# Altium PCB LM-003.PcbDoc (part 1 of 2)
Units mm, origin at the board's own origin, x right, y up, seen from the top; angles counter-clockwise.
Board outline 67.01 x 194 mm, 6 copper layers (Top Layer, +5V, Mid-Layer 1, +3.3V, Mid-Layer 2, Bottom Layer), stack 1.23 mm thick; 63 components, 97 nets, 377 pads, 45 vias.
Unrouted connection lines stored in the file: 19.
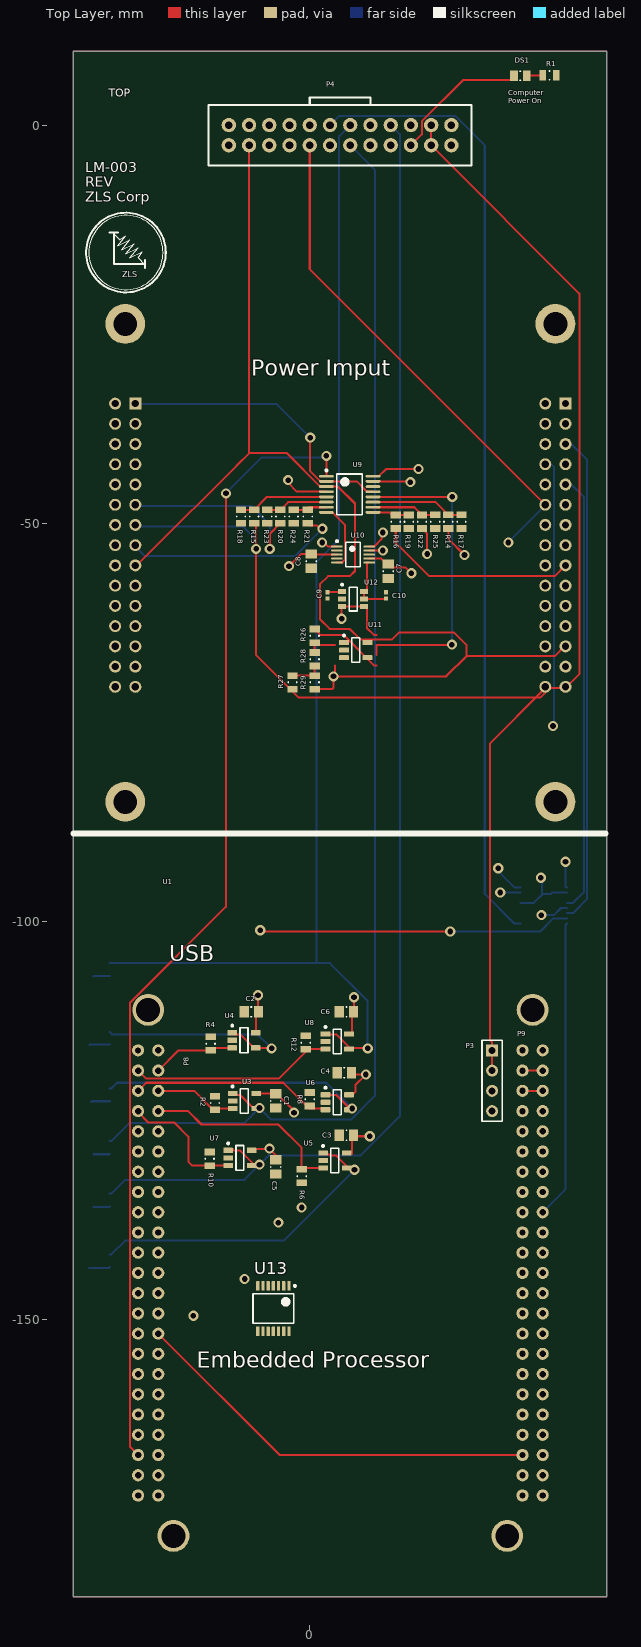
[diagram p0: Top Layer view]
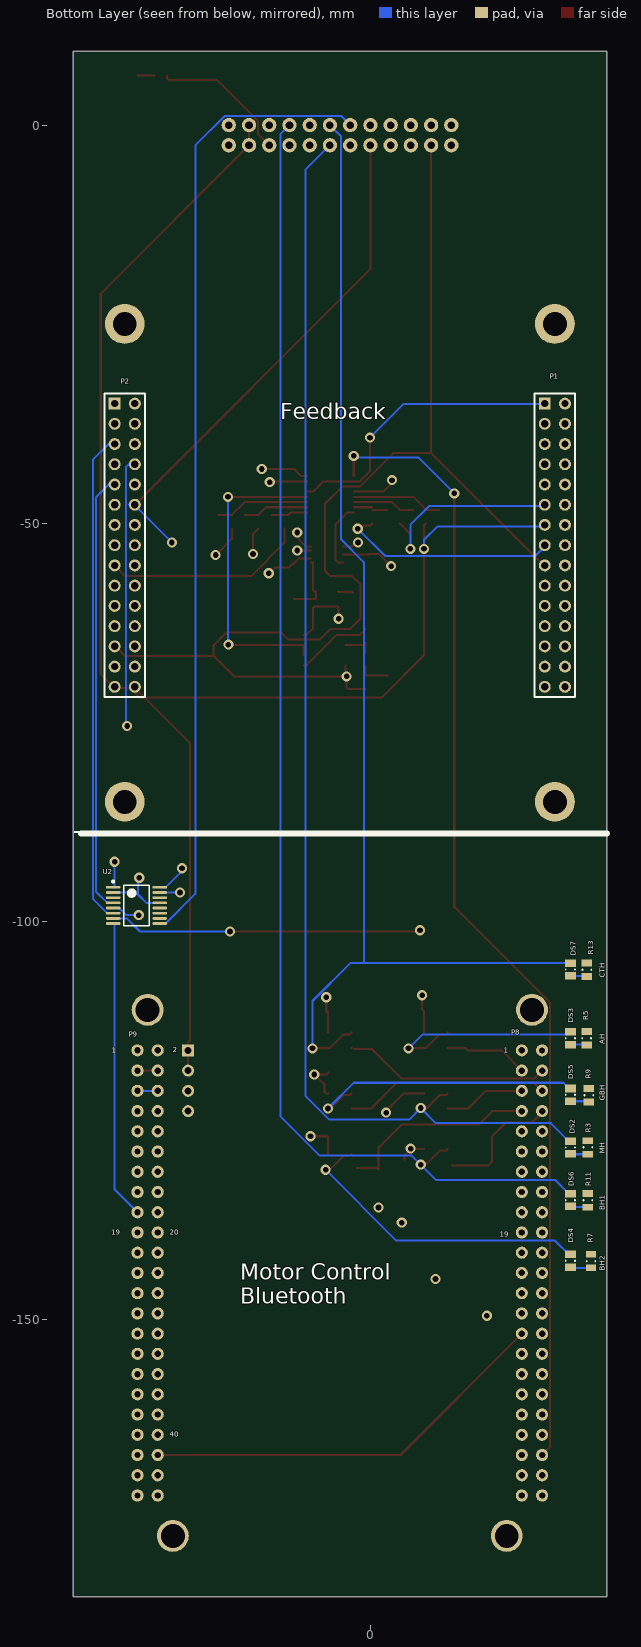
[diagram p1: Bottom Layer view, seen from below]
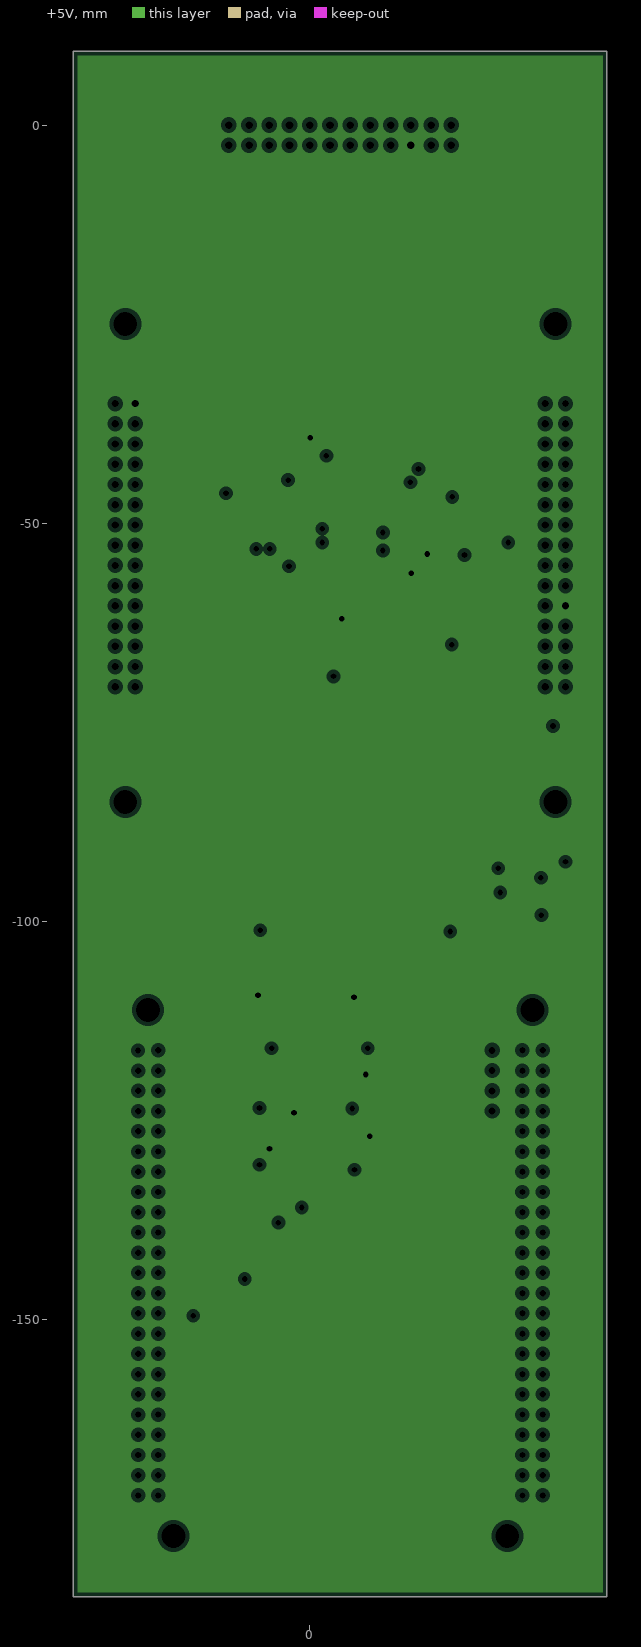
[diagram p2: +5V, clearances drawn from the general rule]
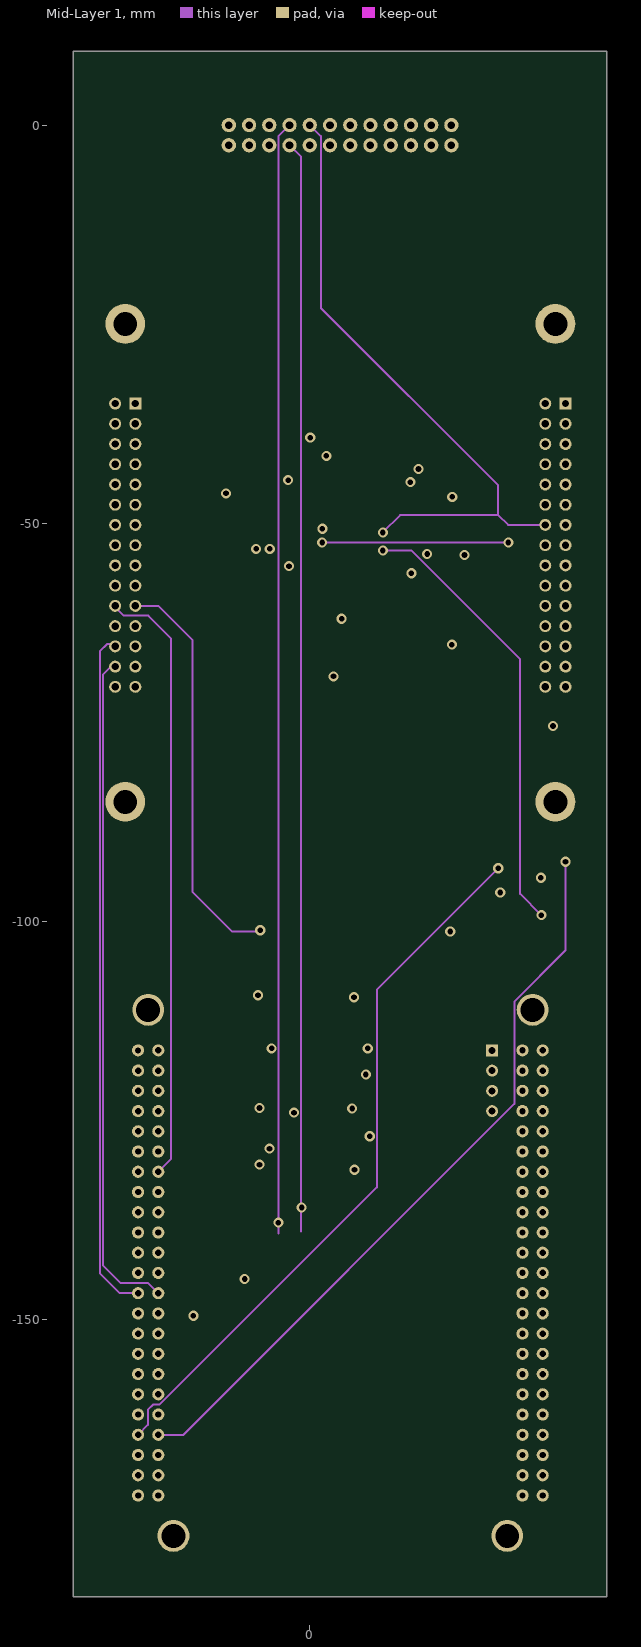
[diagram p3: Mid-Layer 1]
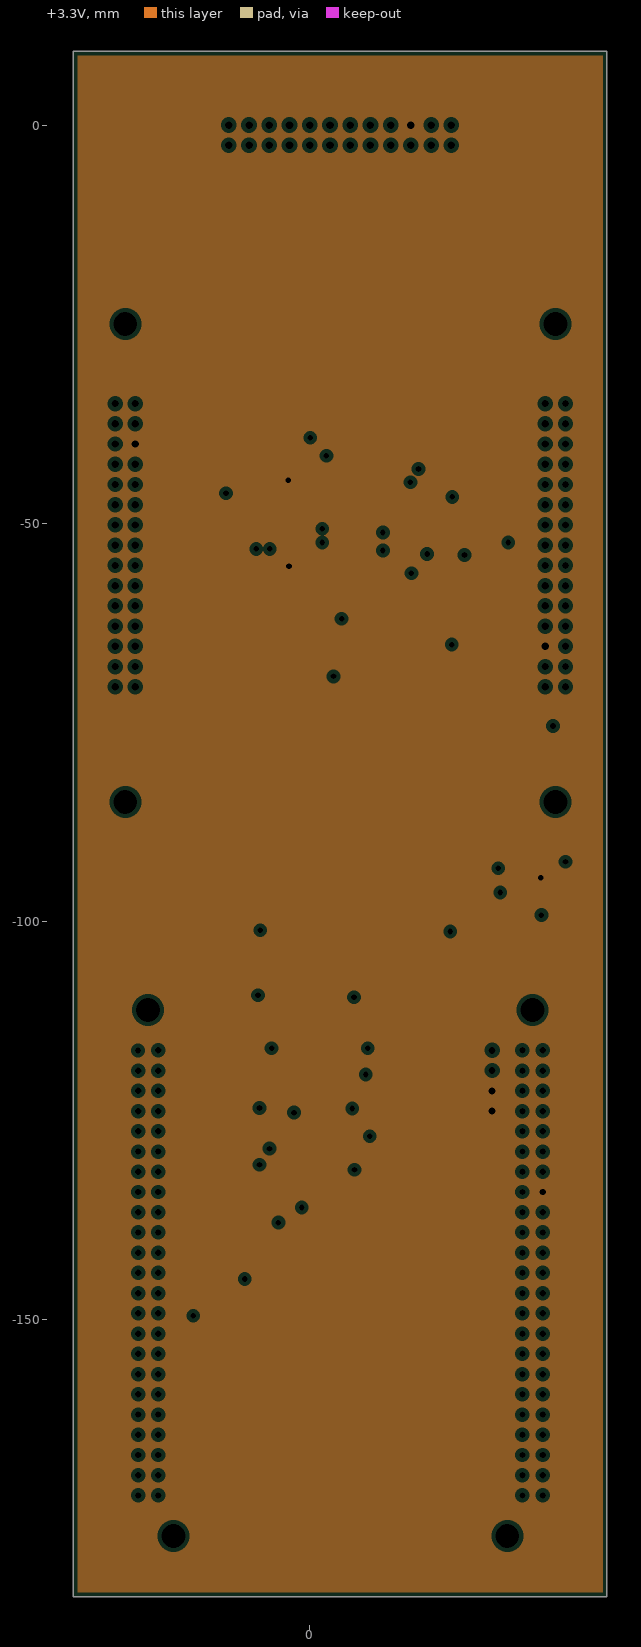
[diagram p4: +3.3V, clearances drawn from the general rule]
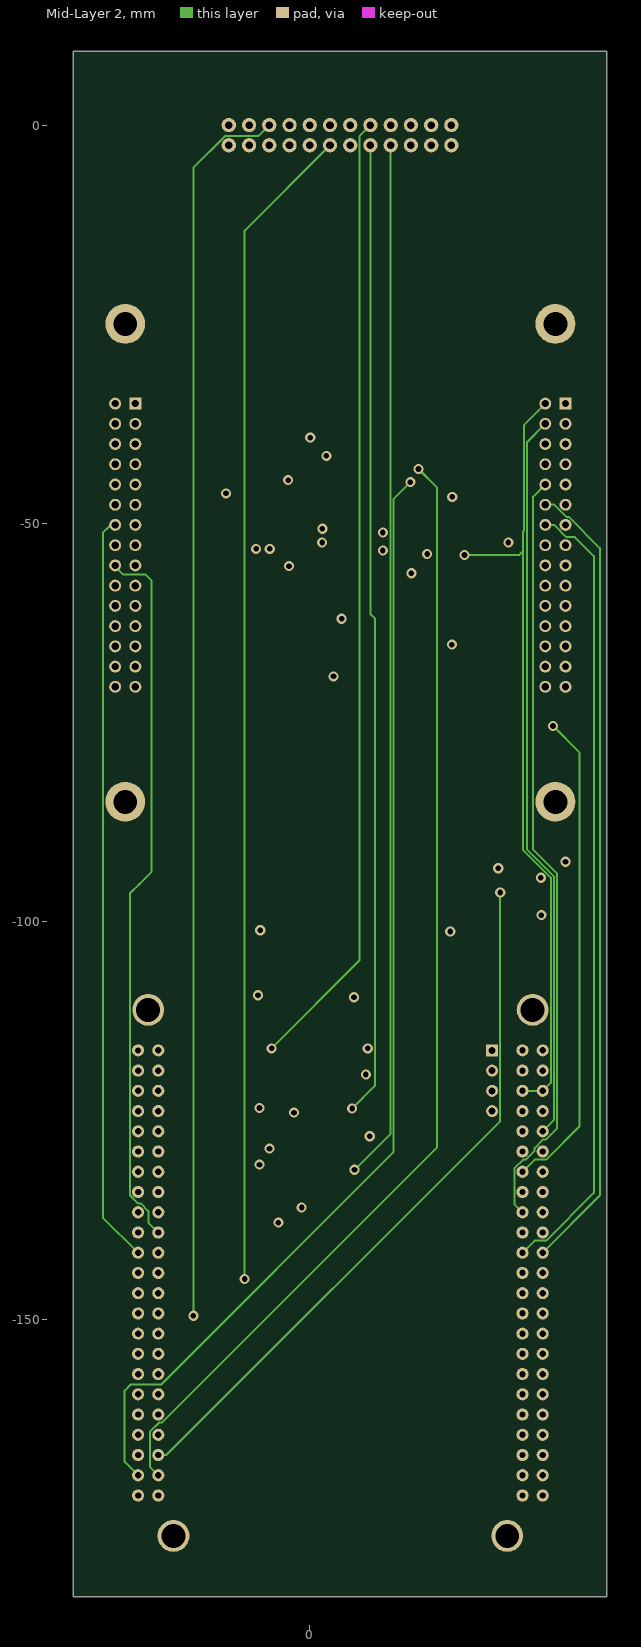
[diagram p5: Mid-Layer 2]

## Layer stack, top to bottom
Top Solder: solder mask 0.0102, Solder Resist, Dk 3.5
Top Layer: signal copper 0.0356
Dielectric 1: core 0.254, FR-4, Dk 4.2
+5V: plane copper 0.036, net +5
Dielectric 7: prepreg 0.127, Dk 4.2
Mid-Layer 1: signal copper 0.0356
Dielectric 6: core 0.254, Dk 4.2
+3.3V: plane copper 0.036, net +3.3
Dielectric2: prepreg 0.127, FR-4, Dk 4.2
Mid-Layer 2: signal copper 0.0356
Dielectric 5: core 0.254, Dk 4.2
Bottom Layer: signal copper 0.0356
Bottom Solder: solder mask 0.0102, Solder Resist, Dk 3.5

## Board outline
-29.695,-184.767 37.31,-184.767 37.31,9.234 -29.695,9.234

## Design rules (kind name [scope] priority, off if disabled: settings)
Clearance [All] p1: gap=0.127 ignorepadtopadclearanceinfootprint=FALSE except(0: Arc-Hole Track-Hole SMDPad-Hole THPad-Hole Via-Hole Fill-Hole Poly-Hole Region-Hole Text-Hole)
ComponentClearance [All] p1: gap=0.229 collisioncheckmode=3 verticalgap=0.254 showdistances=FALSE
HoleSize [All] p1: absolutevalues=TRUE maxlimit=5 minlimit=0.127 maxpercent=80.000 minpercent=20.000
MinimumAnnularRing [All] p1: minimumring=0.254
MinimumSolderMaskSliver [All] p1: minsoldermaskwidth=0.051
PlaneClearance [All] p1: clearance=0.508
PlaneConnect [All] p1: planeconnectstyle=Relief reliefexpansion=0.508 reliefentries=4 reliefconductorwidth=0.254 reliefairgap=0.254
PolygonConnect [All] p1: connectstyle=Relief reliefconductorwidth=0.254 reliefentries=4 polygonreliefangle="90 Angle" airgapwidth=0.254
RoutingVias [All] p1: holewidth=0.3 width=0.7 viastyle="Through Hole" minholewidth=0.1 minwidth=0.381 maxholewidth=0.711 maxwidth=1.27
SilkToSilkClearance [All] p1: silktosilkclearance=0.1
SilkToSolderMaskClearance [IsPad] p1: minsilkscreentomaskgap=0.064 clearancetoexposedcopper=TRUE
SolderMaskExpansion [All] p1: expansion=0.051
Width [All] p1: maxlimit=1 minlimit=0.127 preferedwidth=0.254
23 further rules are at their usual default settings.

## Classes and differential pairs
component class heater_control: C1 C2 C3 C4 C5 C6 DS2 DS3 DS4 DS5 DS6 DS7 P4 R2 R3 R4 R5 R6 R7 R8 R9 R10 R11 R12 R13 U3 U4 U5 U6 U7 U8
component class ADC: C7 C8 C9 C10 R14 R15 R16 R17 R18 R19 R20 R21 R22 R23 R24 R25 R26 R27 R28 R29 U9 U10 U11 U12
component class Connectors: DS1 P1 P2 P3 P14 P16 P? R1
component class "BBB Headers": U1 U2 U13

## Components (designator, comment, footprint, x,y, rotation, side; value= is the part's Value field where it differs from the comment)
C1 "CAP CER 0.1UF 25V X7R 0805" CAPC0805(2012)145_N -4.283,-122.52 r90 top
C2 "CAP CER 0.1UF 25V X7R 0805" CAPC0805(2012)145_N -7.331,-111.344 r0 top
C3 "CAP CER 0.1UF 25V X7R 0805" CAPC0805(2012)145_N 4.607,-126.838 r0 top
C4 "CAP CER 0.1UF 25V X7R 0805" CAPC0805(2012)145_N 4.353,-118.964 r0 top
C5 "CAP CER 0.1UF 25V X7R 0805" CAPC0805(2012)145_N -4.283,-130.81 r90 top
C6 "CAP CER 0.1UF 25V X7R 0805" CAPC0805(2012)145_N 4.607,-111.344 r0 top
C7 "CAP CER 0.1UF 25V X7R 0805" CAPC0805(2012)145_N 9.838,-56.01 r270 top
C8 "CAP CER 0.1UF 25V X7R 0805" CAPC0805(2012)145_N 0.186,-54.74 r270 top
C9 "0.1uF" CAPC0402(1005)60_L 2.218,-59.058 r270 top
C10 "0.1uF" CAPC0402(1005)60_L 9.584,-59.058 r270 top
DS1 "Lite-On LTST-S220KGKT Green LED, 571 nm 2012 (0805) Side View, Rectangle Lens SMD package" 0805C_L 26.444,6.182 r0 top
DS2 "Visible Name Value Type    False Description Lite-On LTST-S220KRKT Red LED, 631 nm 2012 (0805) Side View, Rectangle Lens SMD package STRING" 0805C_L -25.111,-128.362 r270 bottom
DS3 "Visible Name Value Type    False Description Lite-On LTST-S220KRKT Red LED, 631 nm 2012 (0805) Side View, Rectangle Lens SMD package STRING" 0805C_L -25.111,-114.646 r270 bottom
DS4 "Visible Name Value Type    False Description Lite-On LTST-S220KRKT Red LED, 631 nm 2012 (0805) Side View, Rectangle Lens SMD package STRING" 0805C_L -25.111,-142.586 r270 bottom
DS5 "Visible Name Value Type    False Description Lite-On LTST-S220KRKT Red LED, 631 nm 2012 (0805) Side View, Rectangle Lens SMD package STRING" 0805C_L -25.111,-121.758 r270 bottom
DS6 "Visible Name Value Type    False Description Lite-On LTST-S220KRKT Red LED, 631 nm 2012 (0805) Side View, Rectangle Lens SMD package STRING" 0805C_L -25.111,-134.966 r270 bottom
DS7 "Visible Name Value Type    False Description Lite-On LTST-S220KRKT Red LED, 631 nm 2012 (0805) Side View, Rectangle Lens SMD package STRING" 0805C_L -25.111,-106.01 r270 bottom
P1 "SSW-115-23-G-D" SSW-115-23-G-D -21.89,-34.966 r270 bottom locked
P2 "SSW-115-23-G-D" SSW-115-23-G-D 32.11,-34.966 r270 bottom locked
P3 "TSW-104-14-G-S" HDR1X4 22.895,-116.17 r270 top locked
P4 "IPL1-112-01-F-S-K" IPL1-112-01-F-S-K 3.81,-1.27 r0 top
R1 "5.1K" RESC0805(2012)_L 30.099,6.23 r0 top
R2 "20k" RESC0805(2012)_L -11.903,-122.774 r90 top
R3 "4.99K" RESC0805(2012)_L -27.305,-128.356 r90 bottom
R4 "20K" RESC0805(2012)_L -12.446,-115.316 r90 top
R5 "4.99k" RESC0805(2012)_L -27.143,-114.646 r90 bottom
R6 "20K" RESC0805(2012)_L -1.016,-131.953 r270 top
R7 "4.99K" RESC0805(2012)_L -27.686,-142.621 r90 bottom
R8 "20K" RESC0805(2012)_L 0,-122.301 r90 top
R9 "4.99K" RESC0805(2012)_L -27.432,-121.793 r90 bottom
R10 "20K" RESC0805(2012)_L -12.573,-129.794 r90 top
R11 "4.99K" RESC0805(2012)_L -27.305,-135.001 r90 bottom
R12 "20K" RESC0805(2012)_L -0.508,-115.189 r90 top
R13 "4.99K" RESC0805(2012)_L -27.178,-106.045 r90 bottom
R14 "10k" RESC0805(2012)_L 17.399,-49.784 r90 top
R15 "47.5K" RESC0805(2012)_L -6.986,-49.149 r90 top
R16 "100K" RESC0805(2012)_L 10.795,-49.806 r90 top
R17 "10k" RESC0805(2012)_L 19.05,-49.784 r270 top
R18 "10k" RESC0805(2012)_L -8.636,-49.149 r270 top
R19 "10k" RESC0805(2012)_L 12.446,-49.806 r270 top
R20 "47.5K" RESC0805(2012)_L -3.683,-49.149 r90 top
R21 "47.5K" RESC0805(2012)_L -0.254,-49.149 r90 top
R22 "10k" RESC0805(2012)_L 14.097,-49.806 r90 top
R23 "10k" RESC0805(2012)_L -5.334,-49.149 r270 top
R24 "10k" RESC0805(2012)_L -2.032,-49.149 r270 top
R25 "10k" RESC0805(2012)_L 15.748,-49.784 r270 top
R26 "100K" RESC0805(2012)_L 0.608,-64.135 r90 top
R27 "100k" RESC0805(2012)_L -2.159,-69.977 r90 top
R28 "100k" RESC0805(2012)_L 0.608,-67.056 r90 top
R29 "15k" RESC0805(2012)_L 0.608,-69.977 r270 top
U1 "BBB Header x 2" "BEAGLEBONE BLACK THRU" 3.845,-144.11 r0 top locked
U2 "ADG1608BRUZ" ADI-RU-16_M 29.371,-97.971 r180 bottom
U3 "OPA188AIDBVR" DBV0005A_M -8.22,-122.52 r0 top
U4 "OPA188AIDBVR" DBV0005A_M -8.255,-114.9 r0 top
U5 "OPA188AIDBVR" DBV0005A_M 3.149,-129.99 r0 top
U6 "OPA188AIDBVR" DBV0005A_M 3.453,-122.682 r0 top
U7 "OPA188AIDBVR" DBV0005A_M -8.763,-129.667 r0 top
U8 "OPA188AIDBVR" DBV0005A_M 3.453,-115.062 r0 top
U9 "ADG1608BRUZ" ADI-RU-16_M 5.012,-46.358 r0 top
U10 "MAX11100EUB+T" U10+2_L 5.441,-53.923 r0 top
U11 "OPA188AIDBVR" DBV0005A_M 5.774,-65.916 r0 top
U12 "MAX6070AAUT41+T" SOT95P280X445-6N 5.441,-59.511 r0 top
U13 "OPA4188AIPW" PW0014A_L -4.572,-148.59 r270 top

## Footprints (in the part's own frame and the unit in brackets; to place one, negate y for a bottom-side part, rotate by r counter-clockwise, add the part's x,y. Pads: shape width x height; smd on the part's side, far side on the other; paste and mask are expansions set on the pad)
0805C_L [mm]
  rect 0.95x1.35 smd: 1(-0.8,0) 2(0.8,0)
  silkscreen extent -0.05,-0.58 0.05,0.58, body extent -1.1,-0.72 1.1,0.72, height 0.75
ADI-RU-16_M [mm] "SOP, 16-Leads, Body 5x4.4mm, Pitch 0.65mm, IPC Low Density"
  oval 1.85x0.35 smd: 1(-2.925,2.275) 2(-2.925,1.625) 3(-2.925,0.975) 4(-2.925,0.325) 5(-2.925,-0.325) 6(-2.925,-0.975) 7(-2.925,-1.625) 8(-2.925,-2.275) 9(2.925,-2.275) 10(2.925,-1.625) 11(2.925,-0.975) 12(2.925,-0.325) 13(2.925,0.325) 14(2.925,0.975) 15(2.925,1.625) 16(2.925,2.275)
  silkscreen extent -3.05,-2.55 1.6,3.12, body extent -2.25,-2.55 2.25,2.55, height 1.2
"BEAGLEBONE BLACK THRU" [mil]
  round 60 hole 31.5: 8-1(-900,1100) 8-3(-900,1000) 8-4(-1000,1000) 8-5(-900,900) 8-6(-1000,900) 8-7(-900,800) 8-8(-1000,800) 8-9(-900,700) 8-10(-1000,700) 8-11(-900,600) 8-12(-1000,600) 8-13(-900,500) 8-14(-1000,500) 8-15(-900,400) 8-16(-1000,400) 8-17(-900,300) 8-18(-1000,300) 8-19(-900,200) 8-20(-1000,200) 8-21(-900,100) 8-22(-1000,100) 8-23(-900,0) 8-24(-1000,0) 8-25(-900,-100) 8-26(-1000,-100) 8-27(-900,-200) 8-28(-1000,-200) 8-29(-900,-300) 8-30(-1000,-300) 8-31(-900,-400) 8-32(-1000,-400) 8-33(-900,-500) 8-34(-1000,-500) 8-35(-900,-600) 8-36(-1000,-600) 8-37(-900,-700) 8-38(-1000,-700) 8-39(-900,-800) 8-40(-1000,-800) 8-41(-900,-900) 8-42(-1000,-900) 8-43(-900,-1000) 8-44(-1000,-1000) 8-45(-900,-1100) 8-46(-1000,-1100) 9-1(1000,1100) 9-2(900,1100) 9-3(1000,1000) 9-4(900,1000) 9-5(1000,900) 9-6(900,900) 9-7(1000,800) 9-8(900,800) 9-9(1000,700) 9-10(900,700) 9-11(1000,600) 9-12(900,600) 9-13(1000,500) 9-14(900,500) 9-15(1000,400) 9-16(900,400) 9-17(1000,300) 9-18(900,300) 9-19(1000,200) 9-20(900,200) 9-21(1000,100) 9-22(900,100) 9-23(1000,0) 9-24(900,0) 9-25(1000,-100) 9-26(900,-100) 9-27(1000,-200) 9-28(900,-200) 9-29(1000,-300) 9-30(900,-300) 9-31(1000,-400) 9-32(900,-400) 9-33(1000,-500) 9-34(900,-500) 9-35(1000,-600) 9-36(900,-600) 9-37(1000,-700) 9-38(900,-700) 9-39(1000,-800) 9-40(900,-800) 9-41(1000,-900) 9-42(900,-900) 9-43(1000,-1000) 9-44(900,-1000) 9-45(1000,-1100) 9-46(900,-1100)
  round 60 hole 30 paste+0: 8-2(-1000,1100)
  round 157.48 hole 118.11 paste+0: ""(-950,1300)
  round 157.48 hole 118.11: ""(-825,-1300) ""(825,-1300) ""(950,1300)
  body extent -1048,-1163 1048,1160, height 315
CAPC0402(1005)60_L [mm] "Chip Capacitor, Body 1.0x0.5mm, Height 0.6mm, IPC High Density"
  rect 0.52x0.52 smd: 1(-0.4,0) 2(0.4,0)
  body extent -0.55,-0.3 0.55,0.3, height 0.6
CAPC0805(2012)145_N [mm] "Chip Capacitor, Body 2.0x1.2mm, Height 1.45mm, IPC Medium Density"
  rect 1.15x1.45 smd: 1(-0.9,0) 2(0.9,0)
  silkscreen extent -0.05,-0.62 0.05,0.63, body extent -1.1,-0.72 1.1,0.73, height 1.45
DBV0005A_M [mm] "SOT23, 5-Leads, Body 3.05x1.75mm, Pitch 0.95mm, IPC Low Density"
  rrect15% 1.2x0.65 smd: 1(-1.475,0.95) 2(-1.475,0) 3(-1.475,-0.95) 4(1.475,-0.95) 5(1.475,0.95)
  silkscreen extent -1.6,-1.55 0.5,1.95, body extent -1.42,-1.46 1.42,1.46, height 1.08
HDR1X4 [mm] "Connector; Header; 4 Position"
  rect 1.5x1.5 hole 0.9: 1(0,0)
  round 1.5 hole 0.9: 2(2.54,0) 3(5.08,0) 4(7.62,0)
  silkscreen extent -1.27,-1.27 8.89,1.27
IPL1-112-01-F-S-K [mm]
  round 1.8 hole 0.95: 1(-13.97,-1.27) 2(-13.97,1.27) 3(-11.43,-1.27) 4(-11.43,1.27) 5(-8.89,-1.27) 6(-8.89,1.27) 7(-6.35,-1.27) 8(-6.35,1.27) 9(-3.81,-1.27) 10(-3.81,1.27) 11(-1.27,-1.27) 12(-1.27,1.27) 13(1.27,-1.27) 14(1.27,1.27) 15(3.81,-1.27) 16(3.81,1.27) 17(6.35,-1.27) 18(6.35,1.27) 19(8.89,-1.27) 20(8.89,1.27) 21(11.43,-1.27) 22(11.43,1.27) 23(13.97,-1.27) 24(13.97,1.27)
  silkscreen extent -16.51,-3.81 16.51,3.81, body extent -15.95,-4.32 16.05,3.56, height 8.13
PW0014A_L [mm] "SOP, 14-Leads, Body 5.1x4.5mm, Pitch 0.65mm, IPC High Density"
  rrect25% 1.2x0.4 smd: 1(-2.85,1.95) 2(-2.85,1.3) 3(-2.85,0.65) 4(-2.85,0) 5(-2.85,-0.65) 6(-2.85,-1.3) 7(-2.85,-1.95) 8(2.85,-1.95) 9(2.85,-1.3) 10(2.85,-0.65) 11(2.85,0) 12(2.85,0.65) 13(2.85,1.3) 14(2.85,1.95)
  silkscreen extent -2.97,-2.55 1.85,2.83, body extent -3.21,-2.5 3.21,2.5, height 1
RESC0805(2012)_L [mm] "Chip Resistor, Body 2.0x1.3mm, IPC High Density"
  rect 0.85x1.3 smd: 1(-0.85,0) 2(0.85,0)
  silkscreen extent -0.05,-0.55 0.05,0.55, body extent -1.1,-0.67 1.1,0.68, height 0.7
SOT95P280X445-6N [mm] "SOT23, 6-Leads, Body 2.90x2.80mm, Pitch 0.95mm, IPC Medium Density"
  rect 1x0.6 smd: 1(-1.375,0.95) 2(-1.375,0) 3(-1.375,-0.95) 4(1.375,-0.95) 5(1.375,0) 6(1.375,0.95)
  silkscreen extent -1.5,-1.5 0.5,1.92, body extent -2.11,-1.78 2.11,1.73, height 1.08
SSW-115-23-G-D [mm]
  rect 1.5x1.5 hole 0.92: 1(0,0)
  round 1.5 hole 0.92: 2(0,2.54) 3(2.54,0) 4(2.54,2.54) 5(5.08,0) 6(5.08,2.54) 7(7.62,0) 8(7.62,2.54) 9(10.16,0) 10(10.16,2.54) 11(12.7,0) 12(12.7,2.54) 13(15.24,0) 14(15.24,2.54) 15(17.78,0) 16(17.78,2.54) 17(20.32,0) 18(20.32,2.54) 19(22.86,0) 20(22.86,2.54) 21(25.4,0) 22(25.4,2.54) 23(27.94,0) 24(27.94,2.54) 25(30.48,0) 26(30.48,2.54) 27(33.02,0) 28(33.02,2.54) 29(35.56,0) 30(35.56,2.54)
  silkscreen extent -1.27,-1.27 36.83,3.81, body extent -1.52,-1.27 37.08,3.68, height 8.51
U10+2_L [mm] "TSSOP, 10-Leads, Body 3x3mm, Pitch 0.5mm, IPC High Density"
  oval 1.45x0.25 smd: 1(-2.025,1) 2(-2.025,0.5) 3(-2.025,0) 4(-2.025,-0.5) 5(-2.025,-1) 6(2.025,-1) 7(2.025,-0.5) 8(2.025,0) 9(2.025,0.5) 10(2.025,1)
  silkscreen extent -2.15,-1.53 0.9,1.8, body extent -1.55,-1.55 1.55,1.55, height 1.1

## Part data
C1 C2 C3 C4 C5 C6 C7 C8: library part CMP-1036-04795-1, Capacitance=0.1µF, Manufacturer="Murata Electronics North America", Manufacturer Part Number=GRM21BR71E104KA01L, Operating Temperature="-55°C ~ 125°C", Package / Case="0805 (2012 Metric)", Ratings=-, Supplier Part Number 1=490-1673-6-ND, Temperature Coefficient=X7R, Tolerance=±10%, Voltage - Rated=25V, Applications="General Purpose", Category=Capacitors, ComponentLink1Description=http://www.murata.com/~/media/webrenewal/support/library/catalog/products/capacitor/mlcc/c02e.ashx, ComponentLink1URL=http://www.murata.com/~/media/webrenewal/support/library/catalog/products/capacitor/mlcc/c02e.ashx, Features=-, Height - Seated (Max)=-, Lead Spacing=-, Lead Style=-, Mounting Type="Surface Mount, MLCC", Packaging=Digi-Reel®, Part Status=Active, Pricing 1="1=0.2, 10=0.145, 100=0.0683, 500=0.04788, 1000=0.03964 (USD)", RoHS="RoHS Compliant", Size / Dimension="0.079\" L x 0.049\" W (2.00mm x 1.25mm)", Stock 1=891652, Supplier 1=Digi-Key, Thickness (Max)="0.053\" (1.35mm)"
C9 C10: library part CMP-1034-00252-1, "CAP CER 0.1UF 10V X7R 0402", Manufacturer="Murata Electronics North America", Manufacturer Part Number=GRM155R71A104KA01D, Operating Temperature="-55°C ~ 125°C", Package / Case="0402 (1005 Metric)", Ratings=-, Supplier Part Number 1=490-6321-1-ND, Temperature Coefficient=X7R, Tolerance=±10%, Voltage - Rated=10V, Applications="General Purpose", Category=Capacitors, ComponentLink1Description=http://www.murata.com/~/media/webrenewal/support/library/catalog/products/capacitor/mlcc/c02e.ashx?la=en-us, ComponentLink1URL=http://www.murata.com/~/media/webrenewal/support/library/catalog/products/capacitor/mlcc/c02e.ashx?la=en-us, Features=-, Height - Seated (Max)=-, Lead Spacing=-, Mounting Type="Surface Mount, MLCC", Packaging="Cut Tape (CT)", Part Status=Active, Pricing 1="1=0.1, 10=0.014, 100=0.0063, 500=0.00446, 1000=0.00351, 2500=0.00319, 5000=0.00293 (USD)", RoHS="RoHS Compliant", Size / Dimension="0.039\" L x 0.020\" W (1.00mm x 0.50mm)", Stock 1=2920395, Supplier 1=Digi-Key, Thickness (Max)="0.022\" (0.55mm)"
DS1: library part "LED A/K", Case/Package=0805, Case Code (Metric)=2012, Colour=Green, Forward Current=20mA, Forward Voltage=2V, Lens Colour=Colorless, Manufacturer="Vishay / Lite-On", Manufacturer Part Number=LTST-S220KGKT, Max Operating Temperature=85°C, Min Operating Temperature=-55°C, Package Quantity=4000, Power Dissipation=75W, Power Rating=75mW, Supplier Part Number 1=160-1468-1-ND, Case Code (Imperial)=0805, ComponentLink1Description=https://datasheet.ciiva.com/11775/0900766b80dc0b70-11775441.pdf, ComponentLink1URL=https://datasheet.ciiva.com/11775/0900766b80dc0b70-11775441.pdf, ComponentLink2Description=https://datasheet.ciiva.com/2110/s-110-ltst-s220kgkt-2110069.pdf, ComponentLink2URL=https://datasheet.ciiva.com/2110/s-110-ltst-s220kgkt-2110069.pdf, ComponentLink3Description=https://datasheet.ciiva.com/2110/s-110-ltst-s220kgkt-2110070.pdf, ComponentLink3URL=https://datasheet.ciiva.com/2110/s-110-ltst-s220kgkt-2110070.pdf, ComponentLink4Description=https://datasheet.ciiva.com/12400/100-ltst-s220kgkt-59602-12400886.pdf, ComponentLink4URL=https://datasheet.ciiva.com/12400/100-ltst-s220kgkt-59602-12400886.pdf, ComponentLink5Description=https://datasheet.ciiva.com/2110/s-110-ltst-s220kgkt-2110071.pdf, ComponentLink5URL=https://datasheet.ciiva.com/2110/s-110-ltst-s220kgkt-2110071.pdf, ComponentLink6Description=https://datasheet.ciiva.com/16379/ltst-s220kgkt-16379082.pdf, ComponentLink6URL=https://datasheet.ciiva.com/16379/ltst-s220kgkt-16379082.pdf, Depth=0.6mm, Dominant Wavelength=568nm, Height=0.6mm, Illumination Colour=Green, Lead Free="Lead Free", Length=2.1mm, Lens Style=Diffused,Colorless, Lens Transparency=Clear, Luminous Intensity=35mcd, Mount="Surface Mount", Number of Elements=1, Number of LEDs=1, Number of Pins=2, Packaging="Tape and Reel", Pricing 1="1=0.29, 10=0.212, 25=0.1564, 100=0.1117, 250=0.0759, 500=0.067, 1000=0.0525 (USD)", Radiation Hardening=No, Stock 1=74800, Supplier 1=Digi-Key, Test Current=20mA, Viewing Angle=130°, Wavelength=574nm, Width=1mm
DS2 DS3 DS4 DS5 DS6 DS7: library part "LED A/K", Case/Package=0805, Case Code (Metric)=2012, Colour=Red, Forward Current=20mA, Forward Voltage=2V, Lens Colour=Colorless, Manufacturer="Vishay / Lite-On", Manufacturer Part Number=LTST-S220KRKT, Max Operating Temperature=85°C, Min Operating Temperature=-55°C, Package Quantity=4000, Power Dissipation=75mW, Supplier Part Number 1=160-1469-1-ND, Case Code (Imperial)=0805, ComponentLink1Description=https://datasheet.ciiva.com/2110/s-110-ltst-s220krkt-2110132.pdf, ComponentLink1URL=https://datasheet.ciiva.com/2110/s-110-ltst-s220krkt-2110132.pdf, ComponentLink2Description=https://datasheet.ciiva.com/2110/s-110-ltst-s220krkt-2110133.pdf, ComponentLink2URL=https://datasheet.ciiva.com/2110/s-110-ltst-s220krkt-2110133.pdf, ComponentLink3Description=https://datasheet.ciiva.com/2110/s-110-ltst-s220krkt-2110134.pdf, ComponentLink3URL=https://datasheet.ciiva.com/2110/s-110-ltst-s220krkt-2110134.pdf, ComponentLink4Description=https://datasheet.ciiva.com/12403/lite-on-ltst-s220krkt-187389-12403798.pdf, ComponentLink4URL=https://datasheet.ciiva.com/12403/lite-on-ltst-s220krkt-187389-12403798.pdf, ComponentLink5Description=https://datasheet.ciiva.com/16345/lite-onltst-s220krkt-16345511.pdf, ComponentLink5URL=https://datasheet.ciiva.com/16345/lite-onltst-s220krkt-16345511.pdf, ComponentLink6Description=https://datasheet.ciiva.com/15118/getdatasheetpartid-225752-15118120.pdf, ComponentLink6URL=https://datasheet.ciiva.com/15118/getdatasheetpartid-225752-15118120.pdf, ComponentLink7Description=https://datasheet.ciiva.com/14633/0900766b80dc0b76-14633737.pdf, ComponentLink7URL=https://datasheet.ciiva.com/14633/0900766b80dc0b76-14633737.pdf, ComponentLink8Description=https://datasheet.ciiva.com/11775/0900766b80dc0b76-11775439.pdf, ComponentLink8URL=https://datasheet.ciiva.com/11775/0900766b80dc0b76-11775439.pdf, Depth=0.6mm, Dominant Wavelength=631nm, Height=0.6mm, Illumination Colour=Red, Lead Free="Lead Free", Length=2.1mm, Lens Style=Diffused,Colorless, Lens Transparency=Clear, Luminous Intensity=54mcd, Mount="Surface Mount", Number of Elements=1, Number of LEDs=1, Number of Pins=2, Packaging="Tape and Reel", Power Rating=75mW, Pricing 1="1=0.31, 10=0.225, 25=0.1656, 100=0.1183, 250=0.0804, 500=0.071, 1000=0.0556 (USD)", Radiation Hardening=No, Stock 1=108191, Supplier 1=Digi-Key, Test Current=20mA, Viewing Angle=130°, Wavelength=639nm, Width=1mm
P1 P2: library part "Header 15X2", "Header, 15-Pin, Dual row", Current Rating="5.7A per Contact", Insulation Color=Black, Manufacturer="Samtec Inc.", Material Flammability Rating="UL94 V-0", Operating Temperature="-55°C ~ 125°C", Supplier Part Number 1=SSW-115-23-G-D-ND, Voltage Rating=-, Applications=-, Category="Connectors, Interconnects", Connector Type=Receptacle, Contact Finish - Mating=Gold, Contact Finish - Post=Gold, Contact Finish Thickness - Mating="20.0µin (0.51µm)", Contact Finish Thickness - Post="3.00µin (0.076µm)", Contact Length - Post="0.394\" (10.00mm)", Contact Material="Phosphor Bronze", Contact Shape=Square, Contact Type=Forked, Fastening Type=Push-Pull, Features=-, Ingress Protection=-, Insulation Height="0.335\" (8.51mm)", Insulation Material="Liquid Crystal Polymer (LCP)", Manufacturer Part Number=SSW-115-23-G-D, Mated Stacking Heights=-, Mounting Type="Through Hole", Number of Positions=30, Number of Positions Loaded=All, Packaging=Bulk, Part Status=Active, Pitch - Mating="0.100\" (2.54mm)", Pricing 1="1=5.3 (USD)", RoHS="RoHS Compliant", Row Spacing - Mating="0.100\" (2.54mm)", Stock 1=0, Style="Board to Board or Cable", Supplier 1=Digi-Key, Termination=Solder
P3: library part "Header 4", "Header, 4-Pin", Current Rating=-, Insulation Color=Black, Manufacturer="Samtec Inc.", Material Flammability Rating="UL94 V-0", Operating Temperature="-55°C ~ 125°C", Supplier Part Number 1=SAM1053-04-ND, Applications=-, Category="Connectors, Interconnects", ComponentLink1Description=http://suddendocs.samtec.com/prints/tsw-xxx-xx-xxx-x-xx-xxx-mkt.pdf, ComponentLink1URL=http://suddendocs.samtec.com/prints/tsw-xxx-xx-xxx-x-xx-xxx-mkt.pdf, Connector Type=Header, Contact Finish - Mating=Gold, Contact Finish - Post=Gold, Contact Finish Thickness - Mating="10.0µin (0.25µm)", Contact Finish Thickness - Post="3.00µin (0.076µm)", Contact Length - Mating="0.320\" (8.13mm)", Contact Length - Post="0.110\" (2.79mm)", Contact Material="Phosphor Bronze", Contact Shape=Square, Contact Type="Male Pin", Fastening Type=Push-Pull, Features=-, Ingress Protection=-, Insulation Height="0.100\" (2.54mm)", Insulation Material="Polybutylene Terephthalate (PBT)", Manufacturer Part Number=TSW-104-14-G-S, Mated Stacking Heights=-, Mounting Type="Through Hole", Number of Positions=4, Number of Positions Loaded=All, Number of Rows=1, Overall Contact Length="0.530\" (13.46mm)", Packaging=Bulk, Part Status=Active, Pitch - Mating="0.100\" (2.54mm)", Pricing 1="1=1.02, 10=0.915, 100=0.7537, 500=0.59578, 1000=0.51143, 5000=0.46657, 10000=0.44863 (USD)", RoHS="RoHS Compliant", Row Spacing - Mating=-, Shrouding=Unshrouded, Stock 1=278, Style="Board to Board or Cable", Supplier 1=Digi-Key, Termination=Solder, Voltage Rating=-
P4: "IPL1-112-01-F-D-K", Manufacturer="Samtec Inc.", Supplier Part Number 1=IPL1-112-01-F-S-K-ND, Category="Connectors, Interconnects", Manufacturer Part Number=IPL1-112-01-F-S-K, Part Status=Active, Pricing 1="1=2.63 (USD)", RoHS="RoHS Compliant", Stock 1=0, Supplier 1=Digi-Key
R1: library part CMP-1013-00215-1, "RES SMD 5.1K OHM 5% 1/8W 0805", Manufacturer="Vishay Dale", Manufacturer Part Number=CRCW08055K10JNEA, Operating Temperature="-55°C ~ 155°C", Package / Case="0805 (2012 Metric)", Power (Watts)="0.125W, 1/8W", Supplier Device Package=0805, Supplier Part Number 1=541-5.1KACT-ND, Temperature Coefficient=±200ppm/°C, Tolerance=±5%, Category=Resistors, ComponentLink1Description=http://www.vishay.com/docs/20035/dcrcwe3.pdf, ComponentLink1URL=http://www.vishay.com/docs/20035/dcrcwe3.pdf, Composition="Thick Film", Failure Rate=-, Features="Automotive AEC-Q200", Height - Seated (Max)="0.020\" (0.50mm)", Packaging="Cut Tape (CT)", Part Status=Active, Pricing 1="1=0.1, 10=0.044, 100=0.0178, 1000=0.00802, 2500=0.00696 (USD)", RoHS="RoHS Compliant", Size / Dimension="0.079\" L x 0.049\" W (2.00mm x 1.25mm)", Stock 1=429, Supplier 1=Digi-Key
R2 R4 R6 R8 R10 R12: library part CMP-1013-00215-1, "RES SMD 20K OHM 1% 1/8W 0805", Manufacturer="Panasonic Electronic Components", Manufacturer Part Number=ERJ-6ENF2002V, Operating Temperature="-55°C ~ 155°C", Package / Case="0805 (2012 Metric)", Power (Watts)="0.125W, 1/8W", Supplier Device Package=0805, Supplier Part Number 1=P20.0KCCT-ND, Temperature Coefficient=±100ppm/°C, Tolerance=±1%, Category=Resistors, ComponentLink1Description=https://industrial.panasonic.com/cdbs/www-data/pdf/RDA0000/AOA0000C304.pdf, ComponentLink1URL=https://industrial.panasonic.com/cdbs/www-data/pdf/RDA0000/AOA0000C304.pdf, Composition="Thick Film", Failure Rate=-, Features="Automotive AEC-Q200", Height - Seated (Max)="0.028\" (0.70mm)", Packaging="Cut Tape (CT)", Part Status=Active, Pricing 1="1=0.11, 10=0.1, 100=0.0385, 1000=0.01695, 2500=0.01464 (USD)", RoHS="RoHS Compliant", Size / Dimension="0.079\" L x 0.049\" W (2.00mm x 1.25mm)", Stock 1=269698, Supplier 1=Digi-Key
R3 R5 R7 R9 R11 R13: library part CMP-1013-00215-1, "RES SMD 4.99K OHM 1% 1/8W 0805", Manufacturer="Panasonic Electronic Components", Manufacturer Part Number=ERJ-6ENF4991V, Operating Temperature="-55°C ~ 155°C", Package / Case="0805 (2012 Metric)", Power (Watts)="0.125W, 1/8W", Supplier Device Package=0805, Supplier Part Number 1=P4.99KCCT-ND, Temperature Coefficient=±100ppm/°C, Tolerance=±1%, Category=Resistors, ComponentLink1Description=https://industrial.panasonic.com/cdbs/www-data/pdf/RDA0000/AOA0000C304.pdf, ComponentLink1URL=https://industrial.panasonic.com/cdbs/www-data/pdf/RDA0000/AOA0000C304.pdf, Composition="Thick Film", Failure Rate=-, Features="Automotive AEC-Q200", Height - Seated (Max)="0.028\" (0.70mm)", Packaging="Cut Tape (CT)", Part Status=Active, Pricing 1="1=0.11, 10=0.1, 100=0.0385, 1000=0.01695, 2500=0.01464 (USD)", RoHS="RoHS Compliant", Size / Dimension="0.079\" L x 0.049\" W (2.00mm x 1.25mm)", Stock 1=1015773, Supplier 1=Digi-Key
R14 R17 R18 R19 R22 R23 R24 R25: library part CMP-1013-00215-1, "RES SMD 10K OHM 1% 1/8W 0805", Manufacturer=Yageo, Manufacturer Part Number=AT0603FRE0710KL, Operating Temperature="-55°C ~ 155°C", Package / Case="0603 (1608 Metric)", Power (Watts)="0.1W, 1/10W", Supplier Device Package=0603, Supplier Part Number 1=YAG2122CT-ND, Temperature Coefficient=±50ppm/°C, Tolerance=±1%, Category=Resistors, ComponentLink1Description=http://www.yageo.com/documents/recent/PYu-AT_51_RoHS_L_5.pdf, ComponentLink1URL=http://www.yageo.com/documents/recent/PYu-AT_51_RoHS_L_5.pdf, Composition="Thin Film", Failure Rate=-, Features="Anti-Sulfur, Automotive AEC-Q200, Moisture Resistant", Height - Seated (Max)="0.022\" (0.55mm)", Packaging="Cut Tape (CT)", Part Status=Active, Pricing 1="1=0.2, 10=0.17, 100=0.0664, 1000=0.02778, 2500=0.02546 (USD)", RoHS="RoHS Compliant", Size / Dimension="0.063\" L x 0.032\" W (1.60mm x 0.80mm)", Stock 1=13100, Supplier 1=Digi-Key
R15 R20 R21: library part CMP-1013-00215-1, "RES SMD 47.5K OHM 1% 1/10W 0805", Manufacturer=Yageo, Manufacturer Part Number=RT0603FRE0747K5L, Operating Temperature="-55°C ~ 155°C", Package / Case="0603 (1608 Metric)", Power (Watts)="0.1W, 1/10W", Supplier Device Package=0603, Supplier Part Number 1=YAG5964CT-ND, Temperature Coefficient=±50ppm/°C, Tolerance=±1%, Category=Resistors, ComponentLink1Description=http://www.yageo.com/documents/recent/PYu-RT_1-to-0.01_RoHS_L_9.pdf, ComponentLink1URL=http://www.yageo.com/documents/recent/PYu-RT_1-to-0.01_RoHS_L_9.pdf, Composition="Thin Film", Failure Rate=-, Features=-, Height - Seated (Max)="0.022\" (0.55mm)", Packaging="Cut Tape (CT)", Part Status=Active, Pricing 1="1=0.1, 10=0.068, 100=0.0275, 1000=0.01236, 2500=0.01073 (USD)", RoHS="RoHS Compliant", Size / Dimension="0.063\" L x 0.032\" W (1.60mm x 0.80mm)", Stock 1=5000, Supplier 1=Digi-Key
R16 R26 R27 R28: library part CMP-1013-00215-1, "RES SMD 100K OHM 1% 1/10W 0805", Manufacturer="Vishay Beyschlag", Manufacturer Part Number=MCS04020C1003FE000, Operating Temperature="-55°C ~ 155°C", Package / Case="0402 (1005 Metric)", Power (Watts)="0.1W, 1/10W", Supplier Device Package=0402, Supplier Part Number 1=MCS0402-100K-CFCT-ND, Temperature Coefficient=±50ppm/°C, Tolerance=±1%, Category=Resistors, ComponentLink1Description=http://www.vishay.com/docs/28705/mcx0x0xpro.pdf, ComponentLink1URL=http://www.vishay.com/docs/28705/mcx0x0xpro.pdf, Composition="Thin Film", Failure Rate=-, Features=Anti-Sulfur, Height - Seated (Max)="0.015\" (0.37mm)", Packaging="Cut Tape (CT)", Part Status=Active, Pricing 1="1=0.3, 10=0.254, 100=0.0993, 1000=0.04158, 2500=0.03812, 5000=0.03465 (USD)", RoHS="RoHS Compliant", Size / Dimension="0.039\" L x 0.020\" W (1.00mm x 0.50mm)", Stock 1=3521, Supplier 1=Digi-Key
R29: library part CMP-1013-00215-1, "RES SMD 15K OHM 1% 1/10W 0805", Manufacturer="Vishay Beyschlag", Manufacturer Part Number=MCS04020C1502FE000, Operating Temperature="-55°C ~ 155°C", Package / Case="0402 (1005 Metric)", Power (Watts)="0.1W, 1/10W", Supplier Device Package=0402, Supplier Part Number 1=749-1555-1-ND, Temperature Coefficient=±50ppm/°C, Tolerance=±1%, Category=Resistors, ComponentLink1Description=http://www.vishay.com/docs/28705/mcx0x0xpro.pdf, ComponentLink1URL=http://www.vishay.com/docs/28705/mcx0x0xpro.pdf, Composition="Thin Film", Failure Rate=-, Features=Anti-Sulfur, Height - Seated (Max)="0.015\" (0.37mm)", Packaging="Cut Tape (CT)", Part Status=Active, Pricing 1="1=0.3, 10=0.254, 100=0.0993, 1000=0.04158, 2500=0.03812, 5000=0.03465 (USD)", RoHS="RoHS Compliant", Size / Dimension="0.039\" L x 0.020\" W (1.00mm x 0.50mm)", Stock 1=91476, Supplier 1=Digi-Key
U1: library part Beaglebone_Black, "Beaglebone Black Header", Current Rating="5.7A per Contact", Insulation Color=Black, Manufacturer="Samtec Inc.", Manufacturer Part Number=SSW-123-03-G-D, Material Flammability Rating="UL94 V-0", Operating Temperature="-55°C ~ 125°C", Supplier Part Number 1=SSW-123-03-G-D-ND, Voltage Rating=-, Applications=-, Category="Connectors, Interconnects", Connector Type=Receptacle, Contact Finish - Mating=Gold, Contact Finish - Post=Gold, Contact Finish Thickness - Mating="20.0µin (0.51µm)", Contact Finish Thickness - Post="3.00µin (0.076µm)", Contact Length - Post="0.394\" (10.00mm)", Contact Material="Phosphor Bronze", Contact Shape=Square, Contact Type=Forked, Fastening Type=Push-Pull, Features=-, Ingress Protection=-, Insulation Height="0.335\" (8.51mm)", Insulation Material="Liquid Crystal Polymer (LCP)", Mated Stacking Heights=-, Mounting Type="Through Hole", Number of Positions=46, Number of Positions Loaded=All, Packaging=Bulk, Part Status=Active, Pitch - Mating="0.100\" (2.54mm)", Pricing 1="1=6.51 (USD)", RoHS="RoHS Compliant", Row Spacing - Mating="0.100\" (2.54mm)", Stock 1=0, Style="Board to Board or Cable", Supplier 1=Digi-Key, Termination=Solder
U2 U9: library part CMP-0793-00136-1, "4.5 Ohm Ron, 8-Channel +/-5 V,+12 V, +5 V and +3.3 V Multiplexer, 16-pin SOP (RU-16), Tube", Base Part Number=ADG1608, Channel Capacitance (CS(off), CD(off))="19pF, 117pF", Current - Leakage (IS(off)) (Max)=100pA, Manufacturer="Analog Devices Inc.", On-State Resistance (Max)="4.5 Ohm", Operating Temperature="-40°C ~ 125°C (TA)", Package / Case="16-TSSOP (0.173\", 4.40mm Width)", Supplier Device Package=16-TSSOP, Supplier Part Number 1=ADG1608BRUZ-ND, Voltage - Supply, Dual (V±)="±3.3 V ~ 8 V", Voltage - Supply, Single (V+)="3.3 V ~ 16 V", -3db Bandwidth=40MHz, Category="Integrated Circuits (ICs)", Channel-to-Channel Matching (&Delta;Ron)="120 mOhm", Charge Injection=29pC, ComponentLink1Description=http://www.analog.com/media/en/technical-documentation/data-sheets/ADG1608_1609.pdf, ComponentLink1URL=http://www.analog.com/media/en/technical-documentation/data-sheets/ADG1608_1609.pdf, Crosstalk="-64dB @ 1MHz", Manufacturer Part Number=ADG1608BRUZ, Multiplexer/Demultiplexer Circuit=8:1, Packaging=Tube, Part Status=Active, Pricing 1="1=9.31, 96=8.01552, 192=6.95979, 576=6.0605 (USD)", RoHS="RoHS Compliant", Stock 1=1151, Supplier 1=Digi-Key, Switch Circuit=-, Switch Time (Ton, Toff) (Max)="94ns, 93ns"
U3 U4 U5 U6 U7 U8 U11: library part CMP-0809-00005-2, "Precision, Low Noise, Rail-to-Rail Output, Zero-Drift Operational Amplifier, 4 to 36 V, -40 to 125 degC, 5-pin SOT23 (DBV5), Green (RoHS & no Sb/Br)", Current - Supply=450µA, Manufacturer="Texas Instruments", Operating Temperature="-40°C ~ 125°C", Package / Case="SC-74A, SOT-753", Supplier Device Package=SOT-23-5, Supplier Part Number 1=296-40438-1-ND, Voltage - Supply, Single/Dual (±)="4 V ~ 36 V, ±2 V ~ 18 V", Amplifier Type=Zero-Drift, Category="Integrated Circuits (ICs)", ComponentLink1Description=http://www.ti.com/lit/ds/symlink/opa188.pdf, ComponentLink1URL=http://www.ti.com/lit/ds/symlink/opa188.pdf, Manufacturer Part Number=OPA188AIDBVR, Mounting Type="Surface Mount", Output Type=Rail-to-Rail, Packaging="Cut Tape (CT)", Part Status=Active, Pricing 1="1=2.46, 10=2.211, 100=1.7771, 500=1.46002, 1000=1.20974 (USD)", RoHS="RoHS Compliant", Slew Rate="0.8 V/µs", Stock 1=1779, Supplier 1=Digi-Key
U10: library part CMP-0249-00017-1, "IC ADC 16BIT SRL 200KSPS 10UMAX", Base Part Number=MAX11100, Manufacturer="Maxim Integrated", Manufacturer Part Number=MAX11100EUB+, Operating Temperature="-40°C ~ 85°C", Package / Case="10-TFSOP, 10-MSOP (0.118\", 3.00mm Width)", Supplier Device Package=10-uMAX, Supplier Part Number 1=MAX11100EUB+-ND, Voltage - Supply, Analog=5V, Voltage - Supply, Digital="2.7 V ~ 5.25 V", Architecture=SAR, Category="Integrated Circuits (ICs)", ComponentLink1Description=https://datasheets.maximintegrated.com/en/ds/MAX11100.pdf, ComponentLink1URL=https://datasheets.maximintegrated.com/en/ds/MAX11100.pdf, Configuration=S/H-ADC, Data Interface=SPI, Features=-, Input Type="Single Ended", Number of Bits=16, Number of Inputs=1, Packaging=Tube, Part Status=Active, Pricing 1="1=5.98, 10=5.855 (USD)", Ratio - S/H:ADC=1:1, Reference Type=External, RoHS="RoHS Compliant", Sampling Rate (Per Second)=200k, Stock 1=927, Supplier 1=Digi-Key
U12: "IC VREF SERIES 4.096V SOT23", Current - Supply=350µA, Manufacturer="Maxim Integrated", Operating Temperature="-40°C ~ 125°C (TA)", Package / Case=SOT-23-6, Supplier Part Number 1=MAX6070AAUT41+TCT-ND, Temperature Coefficient=6ppm/°C, Tolerance=±0.04%, Voltage - Input="4.3 V ~ 5.5 V", Voltage - Output (Min/Fixed)=4.096V, Category="Integrated Circuits (ICs)", ComponentLink1Description=https://datasheets.maximintegrated.com/en/ds/MAX6070-MAX6071.pdf, ComponentLink1URL=https://datasheets.maximintegrated.com/en/ds/MAX6070-MAX6071.pdf, Manufacturer Part Number=MAX6070AAUT41+T, Mounting Type="Surface Mount", Noise - 0.1Hz to 10Hz=9.6µVp-p, Noise - 10Hz to 10kHz=9µVrms, Output Type=Fixed, Packaging="Cut Tape (CT)", Part Status=Active, Pricing 1="1=3.41, 10=3.213, 25=2.5704, 50=2.4418, 100=2.2491, 250=2.13344, 500=2.05634 (USD)", Reference Type=Series, RoHS="RoHS Compliant", Stock 1=2623, Supplier 1=Digi-Key, Supplier Device Package=SOT-23-6
U13: library part CMP-0809-00010-2, "0.03 uV/C, Low Noise, Rail-to-Rail Output, Zero-Drift Operational Amplifier, 4 to 36 V, -40 to 125 degC, 14-pin SOP (PW14), Green (RoHS & no Sb/Br)", Manufacturer="Texas Instruments", Rating=Catalog, Total Supply Voltage(Max)(+5V is 5, +/-5V is 10)=36, Total Supply Voltage(Min)(+5V is 5, +/-5V is 10)=4, CMRR(Min)(dB)=120, Code_JEDEC=MO-153, ComponentLink1Description="Manufacturer URL", ComponentLink1URL=http://www.ti.com/, ComponentLink2Description=Datasheet, ComponentLink2URL=http://www.ti.com/lit/ds/symlink/opa4188.pdf, ComponentLink3Description="Package Specification", ComponentLink3URL=http://www.ti.com/litv/pdf/mpds360, DatasheetVersion=SBOS641B, Eco-Plan="Green (RoHS & no Sb/Br)", GBW(Typ)(MHz)=2, Iq per channel(Max)(mA)=0.475, Mounting Technology="Surface Mount", Number of Channels=4, Offset Drift(Typ)(uV/C)=0.03, PackageDescription="14-Pin Plastic Small Outline, Body 5 x 4.4 mm, Pitch 0.65 mm", PackageReference=PW0014A, PackageVersion="4040064-3/G, 02/2011", PartId=1, PartNumber=OPA4188AIPW, Slew Rate(Typ)(V/us)=0.8, SubFamily="High Supply Voltage Amplifier (>=30V), Low Noise Amp (<=10nV/rtHz), Low Offset Voltage Amplifier (<=500uV), Low Power Amp (<=500uA), Zero Drift Precision Amplifier"

## Free pads (board coordinates)
  round 5 hole 3 unplated: ""(-23.16,-84.966) ""(-23.16,-24.966) ""(30.84,-84.966) ""(30.84,-24.966)

## Via types
v1: diameter 1.27, hole 0.711, Top Layer to Bottom Layer, 45 vias

## Nets (pads, with @x,y where several pads share a name; then routed paths per layer and width w, separated by ;. In a path a pad name is that pad's centre, name@x,y a point inside that pad or via, vN(x,y) a via of type N, cw(c..) or ccw(c..) an arc to the next point about the centre after c; other vN are vias at no path point)
+3.3: C8.1 P1.5 P2.26 P3.3 P3.4 P4.20 U1.9-15 U2.2 U2.13 U9.4 U10.3 U13.4 | length 20.8
  Top Layer w0.254: v1(-2.717,-44.577) -2.717,-44.924 -1.608,-46.033 U9.4 ; v1(-2.608,-55.375) -1.073,-53.84 C8.1 0.269,-53.923 U10.3
  Bottom Layer w0.254: U2.13 28.132,-97.646 29.176,-96.602 ; v1(29.015,-94.491) 29.176,-94.652 29.176,-96.49 29.232,-96.546 30.276,-96.546 30.476,-96.346 U2.2
"+3.3 BBB": U1.9-3 U1.9-4 | length 2.5
  Top Layer w0.254: U1.9-4 U1.9-3
+5: C1.2 C2.2 C3.2 C4.2 C5.2 C6.2 C7.1 DS1.1 P1.1 P2.21 P4.19 R22.1 U3.5 U4.5 U5.5 U6.5 U7.5 U8.5 U9.2 U9.13 U10.7 U11.5 U12.3 U12.4 | length 101.4
  Top Layer w0.254: U7.5@-6.745,-128.555 -6.718,-128.528 -5.073,-128.528 -4.283,-129.318 C5.2 ; U3.5 -4.183,-121.57 -1.973,-123.78 v1(-1.973,-123.98) ; U4.5@-6.745,-113.95 -6.745,-111.255 -6.494,-111.004 v1(-6.494,-109.248) ; v1(0.059,-39.246) 0.059,-43.455 1.337,-44.733 5.887,-44.733 7.187,-46.033 U9.13 ; v1(3.996,-61.979) 3.996,-60.53 U12.3 7.016,-60.461 7.189,-60.634 7.189,-63.151 8.049,-64.011 8.399,-64.011 ; C4.2 5.494,-119.205 v1(7.044,-119.205) 5.744,-120.505 5.744,-121.372 5.546,-121.57 U6.5@5.32,-121.57 ; 5.32,-129.19 5.32,-127.025 5.393,-126.952 v1(7.527,-126.952) ; U8.5@5.32,-113.95 C6.2@5.32,-111.344 ; C6.2 5.545,-111.306 v1(5.545,-109.502) ; U10.7 9.001,-54.423 9.688,-55.11 C7.1 10.286,-55.558 12.028,-55.558 12.734,-56.264 v1(12.759,-56.264) ; P4.19 14.086,-1.154 14.086,0.478 19.242,5.634 25.296,5.634 25.51,5.848 DS1.1@25.51,6.23 ; R22.1 14.732,-51.291 v1(14.732,-53.848)
  Bottom Layer w0.254: P1.1@-22.342,-34.966 -22.342,-35.044 -4.143,-35.044 v1(0.059,-39.246)
  other v1: -5.046,-128.502
"+5 BBB": P2.2 R14.1 U1.9-5 U1.9-6 | length 111.2
  Top Layer w0.254: R14.1 17.399,-51.943 v1(19.431,-53.975) ; U1.9-6 U1.9-5
  Mid-Layer 2 w0.254: v1(19.431,-53.975) 26.289,-53.975 26.754,-53.51 26.754,-51.057 ; U1.9-6 U1.9-5 30.261,-120.234 30.261,-94.48 26.754,-90.973 26.754,-51.057 ; P2.2@29.634,-34.966 P2.2 26.903,-37.633 26.903,-50.909 26.754,-51.057
  Bottom Layer w0.254: U1.9-6 U1.9-5
+12: P1.13 P2.29 P2.30 P3.1 P3.2 P4.21 P4.22 R15.1 R27.1 | length 207
  Top Layer w0.254: R15.1 -6.731,-50.254 v1(-6.731,-53.213) -6.731,-66.548 -1.397,-71.882 28.954,-71.882 P2.30@30.146,-70.69 ; P4.22 P4.21 33.854,-21.154 33.854,-68.946 32.47,-70.33 32.47,-70.906 32.254,-70.69 P2.30@30.146,-70.69 ; P3.2 P3.1 22.895,-115.154 22.641,-114.9 22.641,-77.619 29.282,-70.978 29.858,-70.978 P2.30@30.146,-70.69
  Bottom Layer w0.254: P1.13@-22.42,-50.206 -22.256,-50.37 -8.431,-50.37 -6.731,-52.07 v1(-6.731,-53.213)
-5: P1.17 P2.25 P4.3 R29.2 U9.3 U11.2 | length 170.6
  Top Layer w0.254: P1.17@-21.89,-55.45 P1.17@-21.726,-55.286 ; P1.17@-21.652,-55.001 -21.652,-55.212 P1.17@-21.726,-55.286 ; -9.203,-42.771 -7.62,-41.188 -2.858,-41.188 1.337,-45.383 3.547,-45.383 5.681,-47.517 5.681,-55.987 5.046,-56.622 2.302,-56.622 1.27,-57.655 1.27,-62.016 2.506,-63.252 4.994,-63.252 6.314,-64.572 10.354,-64.572 11.192,-63.734 18.127,-63.734 19.685,-65.293 19.685,-66.621 17.085,-69.221 3.344,-69.221 v1@3.341,-69.218 ; P4.3 -7.62,-41.18 P1.17@-21.726,-55.286 ; R29.2 2.794,-70.827 2.98,-70.641 v1(2.98,-69.218) 3.149,-69.049 v1@3.149,-69.026 ; 3.149,-67.821 v1@3.149,-69.026 ; P2.25@32.11,-65.61 31.982,-65.61 31.982,-65.446 30.75,-66.678 19.682,-66.678 17.142,-69.218 v1@3.341,-69.218 ; v1@3.149,-69.026 v1@3.341,-69.218
"ADC REF": C10.2 U10.6 U12.5 U12.6 | length 7.9
  Top Layer w0.254: U10.6 7.191,-54.923 7.189,-54.925 7.189,-58.388 7.016,-58.561 U12.6 U12.5 6.842,-59.484 9.558,-59.484 C10.2
AIN: U9.8 U10.5 | length 8.5
  Top Layer w0.254: U9.8 2.837,-48.633 4.395,-50.191 4.395,-54.58 4.054,-54.921 3.418,-54.921 U10.5
"Arrestment Heater FET": R4.1 U1.8-3 U4.3 | length 10.5
  Top Layer w0.254: U1.8-3 -16.48,-116.175 -12.201,-116.175 R4.1@-11.876,-115.85 ; R4.1@-11.903,-115.877 R4.1@-11.876,-115.85 ; U4.3@-9.695,-115.85 R4.1@-11.876,-115.85
"Arrestment Heater FET_Buff": DS3.1 P4.16 U4.1 U4.4 | length 148
  Top Layer w0.254: U4.1@-9.695,-113.95 -9.497,-114.148 -8.722,-114.148 -7.02,-115.85 -6.745,-115.85 -6.712,-115.883 -4.824,-115.883 v1(-4.791,-115.916)
  Mid-Layer 2 w0.254: v1(-4.791,-115.916) 6.234,-104.891 6.234,-1.386 P4.16
  Bottom Layer w0.254: DS3.1 -24.763,-114.194 -6.513,-114.194 v1(-4.791,-115.916)
Batt_1_Stat: P1.8
Batt_2_Stat: P1.10
Battery_1: P1.11 R20.1 | length 25.2
  Top Layer w0.254: v1(-5.021,-53.213) -5.021,-51.337 R20.1
  Bottom Layer w0.254: P1.11@-22.42,-47.666 -22.256,-47.83 -7.372,-47.83 -5.021,-50.181 v1(-5.021,-53.213)
Battery_2: P1.15 R21.1 | length 28.1
  Top Layer w0.254: R21.1 0.044,-50.297 0.929,-50.297 1.308,-50.676 v1(1.583,-50.676)
  Bottom Layer w0.254: P1.15@-22.42,-52.746 -22.054,-52.746 -20.698,-54.102 -1.843,-54.102 v1(1.583,-50.676)
BBB_PWR_SW: P2.4 U1.9-9 | length 91.8
  Mid-Layer 2 w0.254: U1.9-9 30.642,-124.933 30.642,-94.322 27.284,-90.964 27.284,-39.792 P2.4 P2.4@29.634,-37.506
"Board Heater FET 1": R6.1 U1.8-7 U5.3 | length 25.4
  Top Layer w0.254: U1.8-7 -15.275,-123.79 -13.589,-125.476 -3.937,-125.476 -1.016,-128.397 R6.1 -0.853,-130.94 U5.3
"Board Heater FET 2": R10.1 U1.8-8 U7.3 | length 16.1
  Top Layer w0.254: U1.8-8 -21.555,-123.952 -20.285,-125.222 -17.018,-125.222 -15.24,-127 -15.24,-130.175 -14.771,-130.644 R10.1 -12.546,-130.617 U7.3
"Board Heater FET_Buff 1": DS4.1 P4.17 U5.1 U5.4 | length 169.4
  Top Layer w0.254: 2.37,-129.19 2.568,-129.388 3.343,-129.388 5.045,-131.09 v1@5.32,-131.09
  Mid-Layer 2 w0.254: v1(5.623,-131.156) 10.16,-126.619 P4.17
  Bottom Layer w0.254: DS4.1 -24.911,-141.786 -23.171,-140.046 -3.267,-140.046 v1(5.623,-131.156)
"Board Heater FET_Buff 2": DS6.1 P4.18 U7.1 U7.4 | length 169.1
  Top Layer w0.254: U7.1@-9.695,-128.555 -9.497,-128.753 -8.722,-128.753 -7.02,-130.455 U7.4@-6.745,-130.455
  Bottom Layer w0.254: DS6.1 -24.911,-134.166 -23.171,-132.426 -8.22,-132.426 v1(-6.315,-130.521) -5.185,-129.391 6.345,-129.391 11.314,-124.422 11.314,-1.154 P4.18
CH1: R15.2 R18.1 U9.5 | length 11.4
  Top Layer w0.254: R18.1 R15.2 -5.37,-46.683 U9.5
CH2: R20.2 R23.1 U9.6 | length 7.8
  Top Layer w0.254: R23.1 R20.2 -2.717,-47.333 U9.6
CH3: R21.2 R24.1 U9.7 | length 4
  Top Layer w0.254: R24.1 R21.2 ; R21.2@-0.169,-47.983 U9.7
CH4: R26.2 U9.12 U11.1 | length 38.7
  Top Layer w0.254: U9.12 v1(17.885,-46.683) ; 8.399,-66.551 8.399,-65.281 8.424,-65.256 17.814,-65.256 v1(17.839,-65.23)
  Bottom Layer w0.254: v1@17.885,-64.692 v1(17.885,-46.683)
CH5: R14.2 R17.1 U9.11 | length 11.8
  Top Layer w0.254: U9.11 15.798,-47.333 R14.2 R17.1
CH6: R22.2 R25.1 U9.10 | length 8.2
  Top Layer w0.254: U9.10 13.124,-47.983 R22.2 15.726,-48.956 R25.1
CH7: R16.2 R19.1 U9.9 | length 4.6
  Top Layer w0.254: U9.9 9.973,-48.633 10.296,-48.956 R16.2 R19.1
"Conning Tower FET": R12.1 U1.8-4 U8.3 | length 25.5
  Top Layer w0.254: U1.8-4 -20.539,-119.726 -3.912,-119.726 -0.198,-116.012 U8.3 ; U8.3@2.343,-115.877 U8.3@2.37,-115.85
"Conning Tower Heater FET Buff": DS7.1 P4.14 U8.1 U8.4 | length 152.9
  Top Layer w0.254: U8.1@2.37,-113.95 2.568,-114.148 3.343,-114.148 5.045,-115.85 5.32,-115.85 5.353,-115.883 7.241,-115.883 v1(7.274,-115.916)
  Bottom Layer w0.254: DS7.1 2.51,-105.21 7.274,-109.974 v1(7.274,-115.916) ; 0.821,-105.108 0.821,-54.893 3.694,-52.02 3.694,-1.386 P4.14
FB_CS0: P2.5 U2.6 | length 61.2
  Bottom Layer w0.254: U2.6 33.046,-98.946 34.833,-97.159 34.833,-42.029 P2.5@32.85,-40.046
FB_MUX_A0: P1.28 U1.8-25 | length 84.1
  Mid-Layer 1 w0.254: P1.28@-24.96,-67.986 -24.96,-68.179 -25.153,-68.179 -25.964,-68.99 -25.964,-143.142 -23.726,-145.38 -20.285,-145.38 U1.8-25
FB_MUX_A1: P1.26 U1.8-26 | length 85.6
  Mid-Layer 1 w0.254: P1.26@-25.036,-65.154 -25.446,-65.154 -26.345,-66.053 -26.345,-144.146 -23.841,-146.65 U1.8-26
"Gearbox Heater FET": R8.1 U1.8-6 U6.3 | length 25.7
  Top Layer w0.254: U1.8-6 -20.539,-120.234 -3.326,-120.234 -0.09,-123.47 U6.3@2.37,-123.47
"Gearbox Heater FET_Buff": DS5.1 P4.15 U6.1 U6.4 | length 158.1
  Top Layer w0.254: U6.1@2.37,-121.57 2.568,-121.768 3.343,-121.768 5.045,-123.47 v1(5.32,-123.47)
  Mid-Layer 2 w0.254: v1(5.32,-123.47) 8.163,-120.627 8.163,-61.927 7.62,-61.384 P4.15
  Bottom Layer w0.254: DS5.1 -24.911,-120.958 -24.187,-120.234 2.084,-120.234 v1(5.32,-123.47)
GND: C1.1 C2.1 C3.1 C4.1 C5.1 C6.1 C7.2 C8.2 C9.2 C10.1 P1.3 P1.24 P1.27 P2.1 P2.19 P2.20 P2.22 P2.23 P2.24 P2.27 P2.28 P4.1 P4.2 P4.23 P4.24 R1.2 R2.2 R3.2 R4.2 R5.2 R6.2 R7.2 R8.2 R9.2 R10.2 R11.2 R12.2 R13.2 R17.2 R18.2 R19.2 R23.2 R24.2 R25.2 U1.8-1 U1.8-2 U1.9-1 U1.9-2 U1.9-43 U1.9-44 U1.9-45 U1.9-46 U2.3 U2.14 U3.2 U4.2 U5.2 U6.2 U7.2 U8.2 U9.14 U10.2 U10.4 U10.8 U11.3 U12.2 U13.11
Heartbeat: U1.8-29 U1.9-42 | length 52
  Top Layer w0.254: U1.8-29 -3.775,-166.97 U1.9-42
"Meter Heater FET": R2.1 U1.8-5 U3.3 | length 10.2
  Top Layer w0.254: U1.8-5 -14.502,-121.25 -12.282,-123.47 U3.3
"Meter Heater FET_Buff": DS2.1 P4.13 U3.1 U3.4 | length 161.2
  Top Layer w0.254: U3.1 -9.497,-121.768 -8.722,-121.768 -7.02,-123.47 U3.4
  Bottom Layer w0.254: DS2.1 -24.911,-127.562 -22.663,-125.314 -8.22,-125.314 v1(-6.315,-123.409) -4.854,-124.869 5.178,-124.869 8.163,-121.884 8.163,-5.623 P4.13
"MUX A2": P4.7 U13.1 U13.2 | length 136.9
  Mid-Layer 1 w0.254: P4.7 -1.084,-3.996 -1.084,-138.879
  other v1: -1.016,-135.89
"MUX A3": P4.11 U13.13 U13.14 | length 146.8
  Mid-Layer 2 w0.254: v1(-8.175,-144.867) -8.175,-13.255 P4.11
"MUX D2": U1.8-16
MUX_A0: P4.8 U13.8 U13.9 | length 139.7
  Mid-Layer 1 w0.254: -3.902,-139.157 -3.902,-1.362 P4.8
  other v1: -3.937,-137.794
MUX_A1: P4.6 U13.6 U13.7 | length 155.9
  Mid-Layer 2 w0.254: v1(-14.616,-149.49) -14.616,-5.364 -10.638,-1.386 -6.466,-1.386 P4.6
MUX_D0: U1.8-14
MUX_D1: U1.8-15
NetC9_1: C9.1 U12.1 | length 1.9
  Top Layer w0.254: C9.1 2.267,-58.609 4.017,-58.609 U12.1
NetDS1_2: DS1.2 R1.1 | length 2.1
  Top Layer w0.254: DS1.2@27.11,6.23 R1.1
NetDS2_2: DS2.2 R3.1 | length 2.1
  Bottom Layer w0.254: R3.1@-27.143,-129.212 -25.161,-129.212 DS2.2
NetDS3_2: DS3.2 R5.1 | length 2.6
  Bottom Layer w0.254: R5.1@-27.651,-115.496 -27.601,-115.446 DS3.2
NetDS4_2: DS4.2 R7.1 | length 2.6
  Bottom Layer w0.254: R7.1 -25.196,-143.471 DS4.2
NetDS5_2: DS5.2 R9.1 | length 2.4
  Bottom Layer w0.254: R9.1 -27.347,-122.558 DS5.2
NetDS6_2: DS6.2 R11.1 | length 2.1
  Bottom Layer w0.254: R11.1@-27.143,-135.816 -25.161,-135.816 DS6.2
NetDS7_2: DS7.2 R13.1 | length 2.1
  Bottom Layer w0.254: R13.1 -27.093,-106.81 DS7.2
NetR26_1: R26.1 R28.2 U11.4 | length 3.7
  Top Layer w0.254: R28.2 R26.1 ; R26.1@0.693,-65.281 3.149,-65.281
NetR27_2: R27.2 R28.1 R29.1 | length 4
  Top Layer w0.254: R27.2 R29.1 R28.1
NetU1_8-9: U1.8-9
NetU1_8-10: U1.8-10
NetU1_8-11: U1.8-11
NetU1_8-12: U1.8-12
NetU1_8-17: U1.8-17
NetU1_8-18: U1.8-18
NetU1_8-27: U1.8-27
NetU1_8-30: U1.8-30
NetU1_8-35: U1.8-35
NetU1_8-36: U1.8-36
NetU1_8-37: U1.8-37
NetU1_8-38: U1.8-38
"Power A0": U1.8-42 U9.1 | length 143.3
  Top Layer w0.254: U1.8-42 -22.571,-165.954 -22.571,-110.188 -10.525,-98.142 v1(-10.525,-46.234) ; U9.1 2.091,-44.079 v1(2.091,-41.532)
  Bottom Layer w0.254: v1(-10.525,-46.234) -6.017,-41.727 1.897,-41.727 v1(2.091,-41.532)
"Power A1": U1.8-43 U9.16 | length 148.9
  Top Layer w0.254: U9.16 8.687,-44.083 9.587,-43.183 v1(13.648,-43.183)
  Mid-Layer 2 w0.254: U1.8-43 -20.031,-168.494 -20.031,-164.009 -18.928,-162.906 -18.594,-162.906 16.002,-128.31 16.002,-45.537 v1(13.648,-43.183)
"Power A2": U1.8-44 U9.15 | length 147.2
  Top Layer w0.254: U9.15 7.955,-44.751 12.549,-44.751 v1(12.632,-44.834)
  Mid-Layer 2 w0.254: U1.8-44 -23.241,-167.824 -23.241,-158.877 -22.479,-158.115 -18.669,-158.115 10.541,-128.905 10.541,-46.925 v1(12.632,-44.834)
Power_CS0: P2.9 U2.4 | length 54.5
  Bottom Layer w0.254: U2.4 33.046,-97.646 34.452,-96.24 34.452,-46.728 P2.9@32.85,-45.126
PWM1A: P2.8 U1.9-14 | length 94.2
  Mid-Layer 2 w0.254: U1.9-14 28.229,-129.886 29.666,-129.886 33.888,-125.664 33.888,-78.79 v1(30.539,-75.441)
  Bottom Layer w0.254: P2.8@30.31,-42.586 30.691,-42.967 30.691,-75.289 v1(30.539,-75.441)
PWM2A: P1.18 U1.8-19 | length 89.9
  Mid-Layer 2 w0.254: P1.18@-24.43,-55.45 -23.426,-56.454 -20.594,-56.454 -19.858,-57.19 -19.858,-93.766 -21.405,-95.313 -21.416,-95.313 -22.571,-96.468 -22.571,-134.371 -21.578,-135.364 -21.244,-135.364 -20.251,-136.357 -20.251,-137.794 U1.8-19
PWM2B: P1.22 U1.8-13 | length 76.9
  Mid-Layer 1 w0.254: P1.22@-24.96,-60.366 -24.594,-60.366 -23.362,-61.598 -20.276,-61.598 -17.399,-64.475 -17.399,-129.794 U1.8-13
Serial1_RX: U1.9-26
Serial1_TX: U1.9-24
Serial4_RX: U1.9-11
Serial4_TX: U1.9-13
SINE_CS0: P1.21 U2.7 | length 90.6
  Top Layer w0.254: v1(-6.223,-101.092) -6.096,-101.219 v1@17.653,-101.219
  Mid-Layer 1 w0.254: P1.21 -19.009,-60.366 -14.732,-64.643 -14.732,-96.266 -9.779,-101.219 -6.477,-101.219 v1@-6.477,-100.711
  Bottom Layer w0.254: v1(17.636,-101.247) 28.928,-101.247 30.579,-99.596 U2.7
SPI0_CS0: U1.9-17 U2.8 | length 37.5
  Bottom Layer w0.254: U1.9-17 32.125,-133.61 32.125,-100.417 U2.8
"SPI0_CS0_MUX A2": U1.8-41 U2.15 | length 91.5
  Mid-Layer 2 w0.254: U1.8-41 -17.999,-166.97 23.911,-125.06 v1(23.911,-96.358)
  Bottom Layer w0.254: v1(23.911,-96.358) 23.917,-96.352 26.44,-96.352 U2.15
SPI0_CS0_MUX_A0: U1.8-39 U2.1 | length 98.3
  Mid-Layer 1 w0.254: U1.8-39 -15.853,-164.43 25.689,-122.888 25.689,-110.04 32.11,-103.619 v1(32.11,-92.496)
  Bottom Layer w0.254: v1(32.11,-92.496) 32.11,-95.652 32.154,-95.696 U2.1
SPI0_CS0_MUX_A1: U1.8-40 U2.16 | length 94.3
  Mid-Layer 1 w0.254: U1.8-40 -20.32,-163.195 -20.32,-161.29 -19.685,-160.655 -18.883,-160.655 8.416,-133.356 8.416,-108.551 v1(23.657,-93.31)
  Bottom Layer w0.254: v1(23.657,-93.31) 23.851,-93.504 23.851,-93.852 25.696,-95.696 U2.16
SPI0_MISO: P2.12 P4.9 U1.9-21 U10.1 | length 190.3